# Altium PCB rc522.PcbDoc
Units mil, origin at the board's own origin, x right, y up, seen from the top; angles counter-clockwise.
Board outline 1597.91 x 570.09 mil, 2 copper layers (Top Layer, Bottom Layer); 2 components, 1 nets, 32 pads, 1 vias.
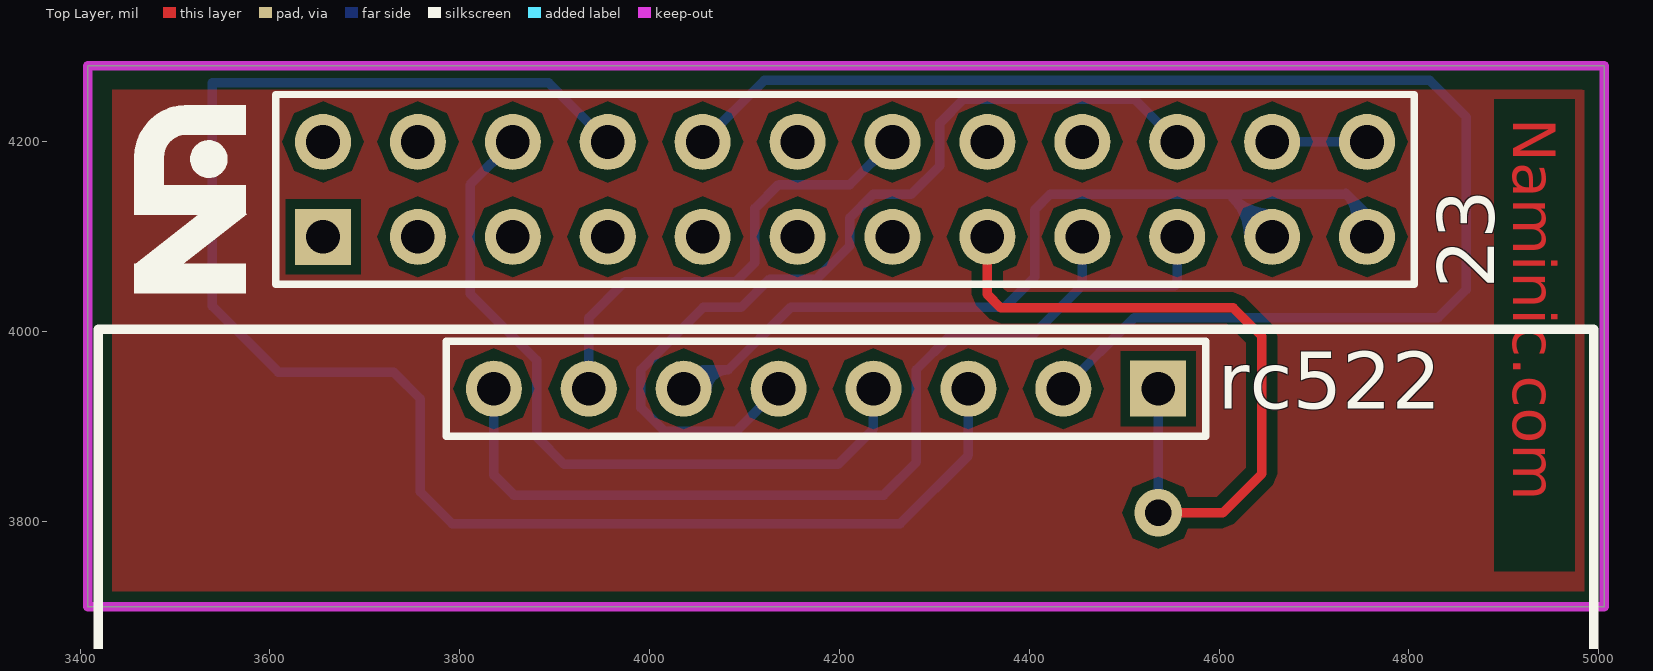
[diagram p0: Top Layer view]
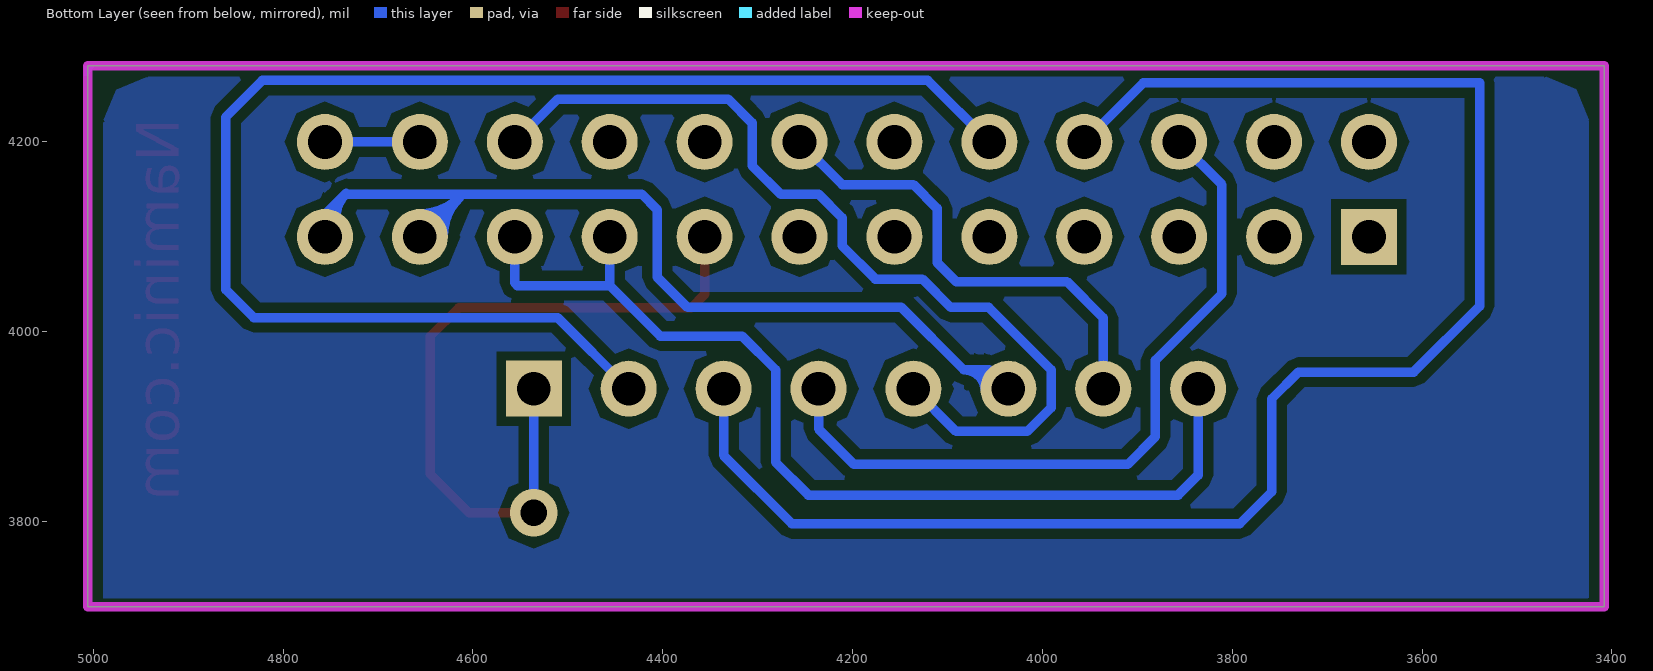
[diagram p1: Bottom Layer view, seen from below]

## Layer stack, top to bottom
Top Layer: signal copper 1.4
Dielectric: dielectric 12.6, FR-4, Dk 4.8
Bottom Layer: signal copper 1.4

## Board outline
3407.99,4280.09 3407.99,3710 5005.9,3710 5005.9,4280.09

## Design rules (kind name [scope] priority, off if disabled: settings)
Clearance [All] p1: gap=10
PolygonConnect [All] p1: connectstyle=Relief reliefconductorwidth=10 reliefentries=4 polygonreliefangle="90 Angle"
RoutingVias [All] p1: holewidth=28 width=50 viastyle="Through Hole" minholewidth=28 minwidth=50 maxholewidth=28 maxwidth=50
SilkscreenOverComponentPads [All] p1: minsilkscreentomaskgap=10
SolderMaskExpansion [All] p1: expansion=4
Width [All] p1: maxlimit=10 minlimit=10 preferedwidth=10
27 further rules are at their usual default settings.

## Components (designator, comment, footprint, x,y, rotation, side; value= is the part's Value field where it differs from the comment)
23 "Header 12X2" HDR2X12 3655.9,4099.77 r0 top (schematic designator P?)
rc522 "" HDR1X8 4535.9,3939.77 r180 top

## Footprints (in the part's own frame and the unit in brackets; to place one, negate y for a bottom-side part, rotate by r counter-clockwise, add the part's x,y. Pads: shape width x height; smd on the part's side, far side on the other; paste and mask are expansions set on the pad)
HDR1X8 [mm] "Connector; Header; 8 Position"
  rect 1.5x1.5 hole 0.9: 1(0,0)
  round 1.5 hole 0.9: 2(2.54,0) 3(5.08,0) 4(7.62,0) 5(10.16,0) 6(12.7,0) 7(15.24,0) 8(17.78,0)
  silkscreen extent -1.27,-1.27 19.05,1.27
HDR2X12 [mm] "Connector; Header; 12x2 Position"
  rect 1.5x1.5 hole 0.9: 1(0,0)
  round 1.5 hole 0.9: 2(0,2.54) 3(2.54,0) 4(2.54,2.54) 5(5.08,0) 6(5.08,2.54) 7(7.62,0) 8(7.62,2.54) 9(10.16,0) 10(10.16,2.54) 11(12.7,0) 12(12.7,2.54) 13(15.24,0) 14(15.24,2.54) 15(17.78,0) 16(17.78,2.54) 17(20.32,0) 18(20.32,2.54) 19(22.86,0) 20(22.86,2.54) 21(25.4,0) 22(25.4,2.54) 23(27.94,0) 24(27.94,2.54)
  silkscreen extent -1.27,-1.27 29.21,3.81

## Part data
23: "Header, 12-Pin, Dual row"
rc522: library part "Header 8", "Header, 8-Pin"

## Via types
v1: diameter 50, hole 28, Top Layer to Bottom Layer, 1 vias

## Nets (pads, with @x,y where several pads share a name; then routed paths per layer and width w, separated by ;. In a path a pad name is that pad's centre, name@x,y a point inside that pad or via, vN(x,y) a via of type N, cw(c..) or ccw(c..) an arc to the next point about the centre after c; other vN are vias at no path point)
CS: 23.15 | length 639.1
  Top Layer w10: 23.15 4355.9,4039.1 4370,4025 4615,4025 4645,3995 4645,3850 4604.1,3809.1 v1(4535.9,3809.1)
pads on no net: 23.1 23.2 23.3 23.4 23.5 23.6 23.7 23.8 23.9 23.10 23.11 23.12 23.13 23.14 23.16 23.17 23.18 23.19 23.20 23.21 23.22 23.23 23.24 rc522.1 rc522.2 rc522.3 rc522.4 rc522.5 rc522.6 rc522.7 rc522.8
copper on no net: | length 8041.2
  Bottom Layer w10: 3835.9,3939.77 3835.9,3848.84 3856.97,3827.77 4246.58,3827.77 4280.9,3862.08 4280.9,3959.77 4316.36,3995.23 4402.66,3995.23 4455.9,4048.47 ; 3855.9,4199.77 3810.9,4154.77 3810.9,4039.77 3880.9,3969.77 3880.9,3889.24 3910.04,3860.1 4198.52,3860.1 4235.9,3897.48 4235.9,3939.77 ; 3935.9,3939.77 3935.9,4014.38 3974.22,4052.7 4090.9,4052.7 4110.9,4072.69 4110.9,4129.77 4135.9,4154.77 4210.9,4154.77 4255.9,4199.77 ; 3955.9,4199.77 3893.75,4261.91 3539.44,4261.91 3539.44,4026.72 3608.86,3957.3 3730.23,3957.3 3758.33,3929.2 3758.33,3831.15 3792.05,3797.44 4263.85,3797.44 4335.9,3869.49 4335.9,3939.77 ; 4035.9,3939.77 4055.9,3959.77 4082.91,3959.77 ; 4040.42,3939.52 cw(c4061.79,3938.37) 4061.79,3959.77 ; 4050.41,3938.98 cw(c4072.35,3937.79) 4072.35,3959.77 ; 4055.9,4199.77 4120.9,4264.77 4821.77,4264.77 4860.52,4226.01 4860.52,4044.25 4831.04,4014.77 4510.9,4014.77 4435.9,3939.77 ; 4060.39,3938.44 cw(c4082.9,3937.22) 4082.9,3959.77 ; 4135.9,3939.77 4090.9,3894.77 4015.9,3894.77 3990.9,3919.77 3990.9,3959.77 4056.78,4025.65 4096.78,4025.65 4126.37,4055.24 4175.9,4055.24 4210.9,4090.24 4210.9,4119.77 4235.9,4144.77 4275.9,4144.77 4305.9,4174.77 4305.9,4219.77 4330.9,4244.77 4510.9,4244.77 4555.9,4199.77 ; 4455.9,4099.77 4455.9,4048.47 ; 4535.9,3809.1 4535.9,3860.9 4535.9,3939.77 ; 4555.9,4099.77 4555.9,4051.25 4553.12,4048.47 4455.9,4048.47 ; 4631.37,4099.77 ccw(c4572.16,4099.77) 4614.03,4141.64 ccw(c4655.9,4183.51) 4655.9,4124.29 ; 4641.37,4099.77 ccw(c4606.3,4099.77) 4631.1,4124.57 ccw(c4655.9,4149.37) 4655.9,4114.29 ; 4655.9,4099.77 4610.9,4144.77 ; 4655.9,4199.77 4755.9,4199.77 ; 4733.56,4145.51 cw(c4706.48,4118.43) 4742.31,4104.9 ; 4744.51,4134.56 cw(c4722.38,4112.42) 4751.67,4101.37 ; 4755.9,4099.77 4755.9,4123.17 4734.31,4144.77 4610.9,4144.77 ; 4082.91,3959.77 4148.62,4025.49 4373.93,4025.49 4405.9,4057.46 4405.9,4128.49 4422.18,4144.77 4610.9,4144.77

## Polygon pours and split planes (outlines as drawn)
no net on Top Layer "Top Layer-No Net" (solid, pour order 1001): 4985,3720 3424.54,3720 3420,3720.97 3433.61,3723.88 3433.61,4255 4982.73,4255 4985,4254.51
no net on Bottom Layer "Top Layer-No Net" (solid, pour order 1000): 3420,4280 5010,4280 5010,3718.85 3425.38,3718.85 3420,3715

## Keep-outs
Keep-Out Layer:
  the board outline again, w10

## Other copper
Top Layer:
  text "Naminic.com" at 4910,4225 h45 r270

## Silkscreen, mask and mechanical layers (free items; w line width, h text height)
Top Overlay:
  circle w19.68: c3535.63,4181.73 r10.04
  region: 3575,4040 3575,4071.5 3456.89,4071.5 3456.89,4040
  region: 3575,4122.68 3575,4154.17 3456.89,4154.17 3456.89,4122.68
  region: 3575.72,4123.33 3556.33,4148.15 3458.27,4071.54 3477.66,4046.72
  region: 3575,4207.32 3575,4238.82 3512.01,4238.82 3512.01,4207.32
  region: 3488.39,4183.7 3456.89,4183.7 3456.89,4122.68 3488.39,4122.68
  lines w10: 3866.26,3152.25 ccw(c4180.29,2684.1) 3896.8,2196.84 ; 3991,2356.12 cw(c4124.7,2682.97) 3995.78,3011.73 ; 4076.62,2920.18 ccw(c4177.3,2690.51) 4083.09,2458.1 ; 4140.73,2814.4 ccw(c4157.06,2700.11) 4150.53,2584.85 ; 4231.84,2589.53 ccw(c4225.32,2704.79) 4241.64,2819.08 ; 4299.29,2462.78 ccw(c4205.07,2695.18) 4305.75,2924.86 ; 4386.6,3016.41 cw(c4257.67,2687.65) 4391.38,2360.8 ; 4485.58,2201.52 ccw(c4202.09,2688.77) 4516.12,3156.93 ; 3418.95,1797.62 3418.95,4002.55 4994.62,4002.55 4994.62,1797.62 3418.95,1797.62
  lines w31.5: 3472.64,4183.7 cw(c3512.01,4183.7) 3512.01,4223.07
  text "RFID-RC522" at 3914.2,2060.21 h60